# Altium PCB audio_led_lamp.PcbDoc
Units mm, origin at the board's own origin, x right, y up, seen from the top; angles counter-clockwise.
Board outline 23 x 43.02 mm, 2 copper layers (Top Layer, Bottom Layer); 17 components, 20 nets, 74 pads, 0 vias.
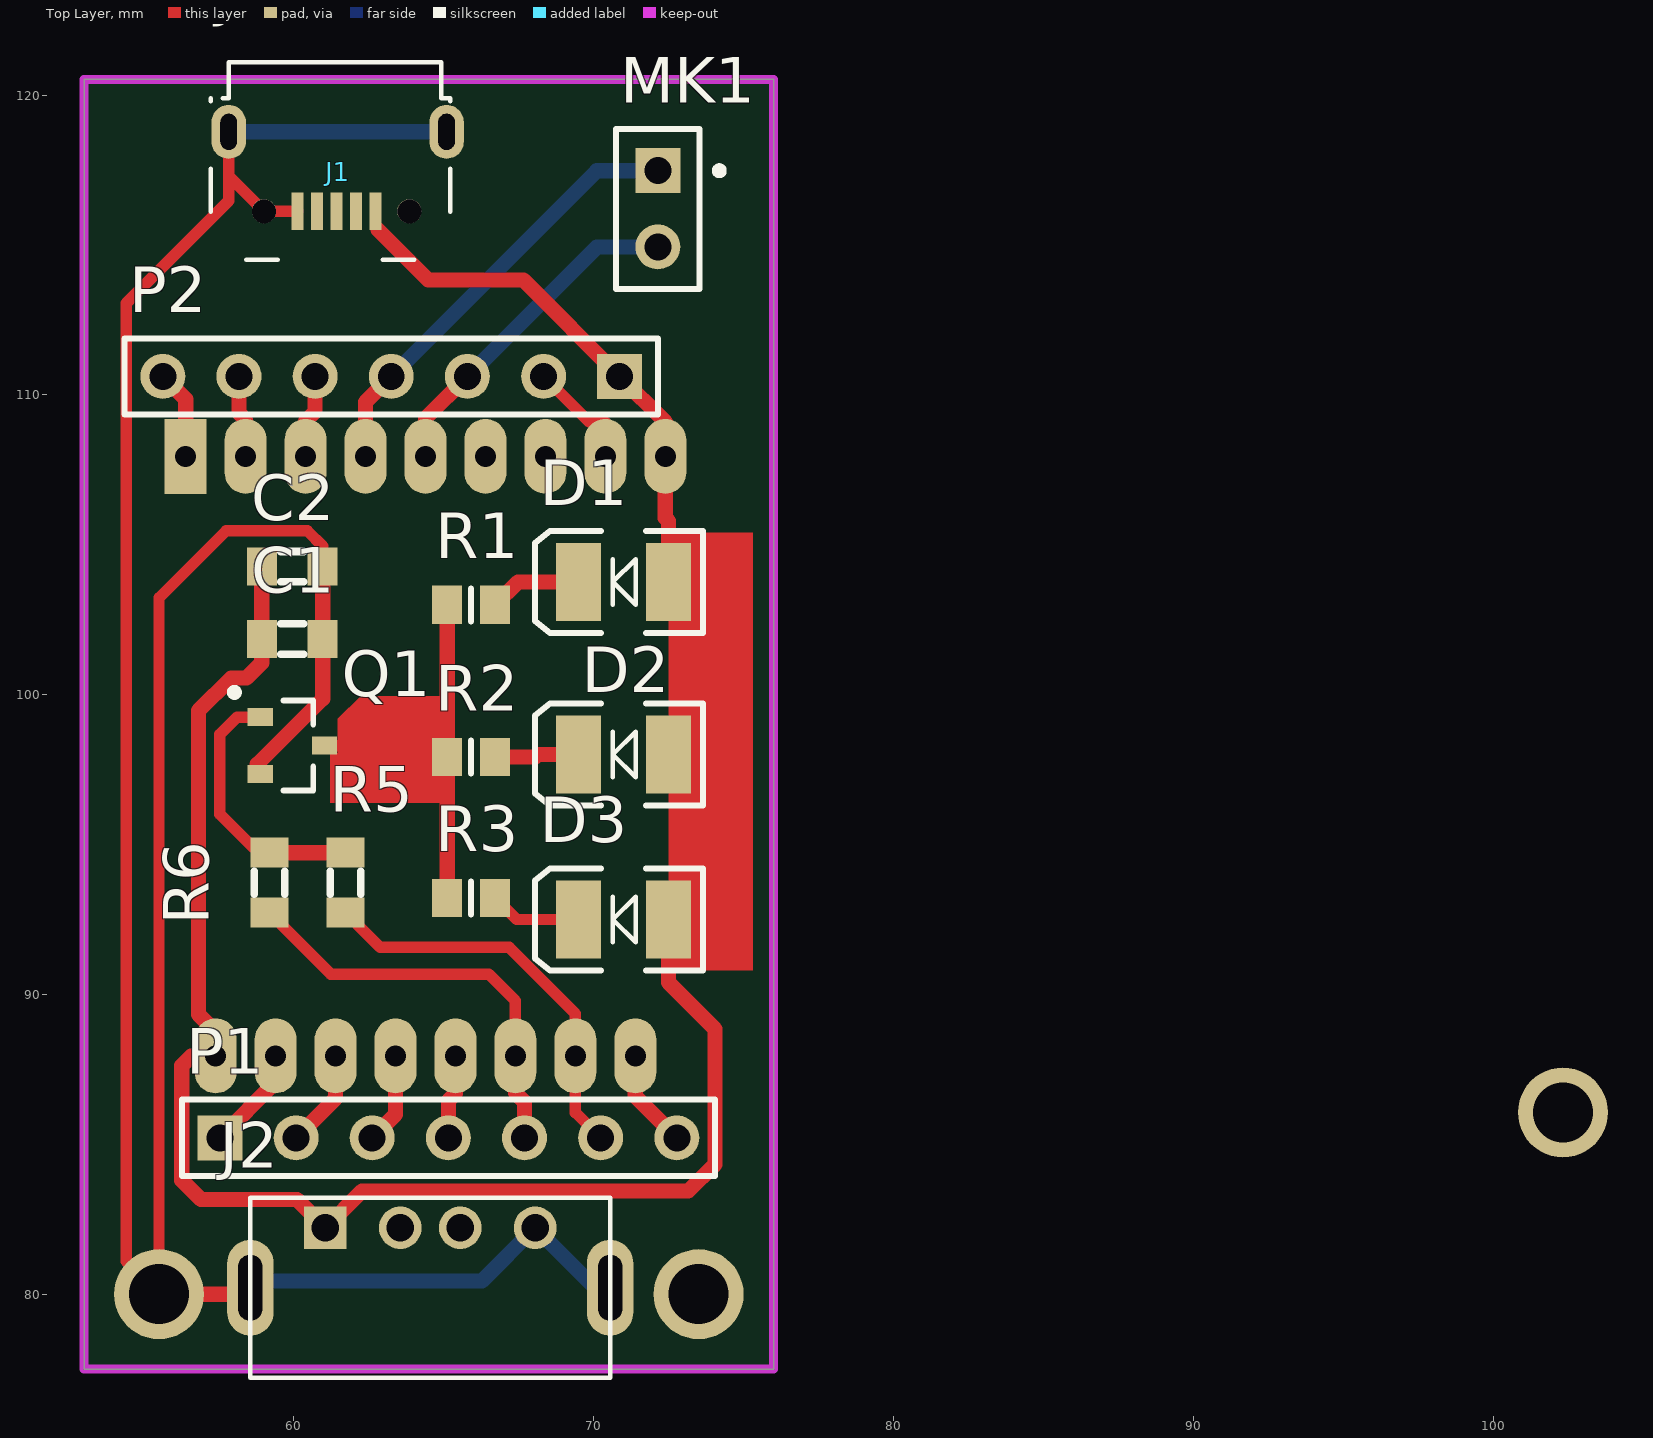
[diagram p0: Top Layer view]
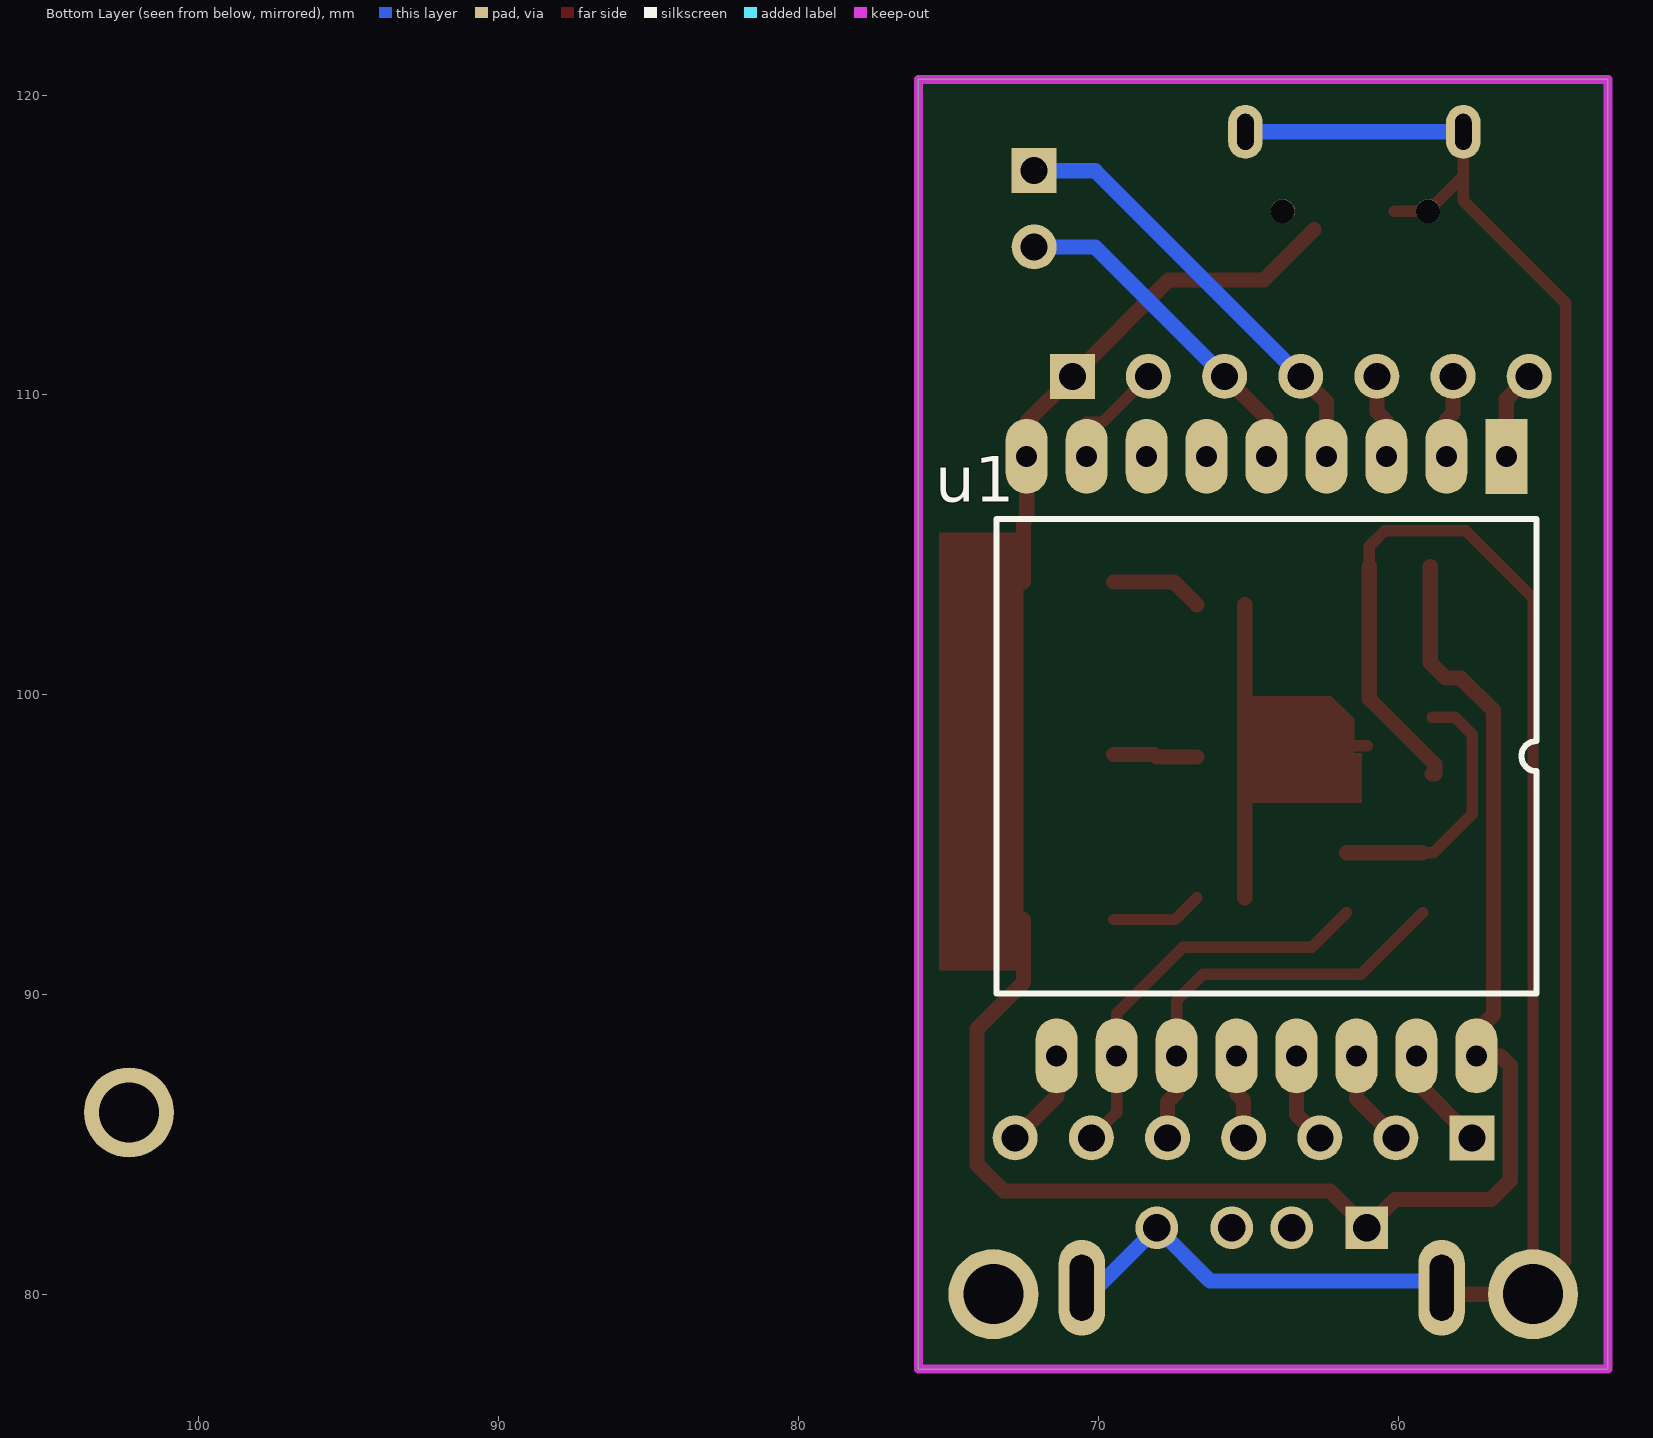
[diagram p1: Bottom Layer view, seen from below]

## Layer stack, top to bottom
Top Layer: signal copper 0.0356
Dielectric: dielectric 0.32, FR-4, Dk 4.8
Bottom Layer: signal copper 0.0356

## Board outline
53,77.5 53,120.523 76,120.523 76,77.5

## Design rules (kind name [scope] priority, off if disabled: settings)
Clearance clearance_vcc [InNet('VCC') vs InNet('GND')] p1: gap=0.254
Clearance [All] p2: gap=0.254
ComponentClearance [All] p1: gap=0.254 collisioncheckmode=3 verticalgap=0.254
PolygonConnect [All] p1: connectstyle=Relief reliefconductorwidth=0.254 reliefentries=4 polygonreliefangle="90 Angle"
RoutingVias [All] p1: holewidth=0.6 width=1 viastyle="Through Hole" minholewidth=0.711 minwidth=1.27 maxholewidth=0.711 maxwidth=1.27
SolderMaskExpansion [All] p1: expansion=0.102
TestPointUsage [All] p1: valid=0 allowmultiple=FALSE
Testpoint [All] p1: side=15 testpointundercomponent=TRUE minsize=1.016 maxsize=2.54 preferedsize=1.524 minholesize=0 maxholesize=1.016 preferedholesize=0.813 testpointgrid=0.025 style=1023 order=0123456789
Width vcc [InNet('VCC')] p1: maxlimit=1 minlimit=0.254 preferedwidth=0.508
Width all [All] p2: maxlimit=0.508 minlimit=0.254 preferedwidth=0.381
Width gnd [InNet('GND')] p3: maxlimit=1 minlimit=0.254 preferedwidth=0.508
18 further rules are at their usual default settings.

## Components (designator, comment, footprint, x,y, rotation, side; value= is the part's Value field where it differs from the comment)
C1 "Cap" C0805_N 59.944,101.854 r180 top
C2 "Cap" C0805_N 59.944,104.267 r180 top
D1 "LED" LED3528 70.993,103.759 r180 top
D2 "LED" LED3528 70.993,98.002 r180 top
D3 "LED" LED3528 70.993,92.498 r180 top
J1 "usb-micro-b" usb-micro-b 65.024,120.523 r180 top
J2 "USB 2.0 Type A" usb-a-mail 58.547,77.216 r0 top
MK1 "Mic2" PIN2 72.136,117.475 r270 top
P1 "Header 7" HDR1X7 57.531,85.217 r0 top
P2 "Header 7" HDR1X7 70.866,110.617 r180 top
Q1 "NPN" SOT23-3_L 59.944,98.298 r0 top
R1 "Res" R0805_L 65.913,102.997 r0 top
R2 "Res" R0805_L 65.913,97.917 r0 top
R3 "Res" R0805_L 65.913,93.218 r0 top
R5 "Res" R0805_M 61.722,93.726 r90 top
R6 "Res" R0805_M 59.182,93.726 r90 top
u1 "snr9813" SNR9813M17 56.388,107.95 r270 bottom

## Footprints (in the part's own frame and the unit in brackets; to place one, negate y for a bottom-side part, rotate by r counter-clockwise, add the part's x,y. Pads: shape width x height; smd on the part's side, far side on the other; paste and mask are expansions set on the pad)
C0805_N [mm] "Chip Capacitor, Body 2.0x1.2mm, IPC Medium Density"
  rect 1x1.27 smd: 1(-1.016,0) 2(1.016,0)
  silkscreen extent -0.38,-0.51 0.38,0.51, body extent -1,-0.6 1,0.6, height 0.7
HDR1X7 [mm] "Connector; Header; 7 Position"
  rect 1.5x1.5 hole 0.9: 1(0,0)
  round 1.5 hole 0.9: 2(2.54,0) 3(5.08,0) 4(7.62,0) 5(10.16,0) 6(12.7,0) 7(15.24,0)
  silkscreen extent -1.27,-1.27 16.51,1.27
LED3528 [mm] "SM LED; 2 C-Bend Leads; Body 3.5 x 2.8 x 1.9 mm, inc leads (LxWxH typ)"
  rect 1.5x2.6 smd: 1(-1.5,0) 2(1.5,0)
  silkscreen extent -2.65,-1.7 2.95,1.7, body extent -1.75,-1.4 1.75,1.4, height 1.9
PIN2 [mm] "Photosensitive Diode; 2 Leads"
  rect 1.5x1.5 hole 0.9: 1(0,0)
  round 1.5 hole 0.9: 2(2.54,0)
  silkscreen extent -1.4,-1.4 3.94,2.18
R0805_L [mm] "Chip Resistor, Body 2.0x1.2mm, IPC High Density"
  rect 1x1.27 smd: 1(-0.8,0) 2(0.8,0)
  silkscreen extent 0,-0.55 0,0.55, body extent -1,-0.6 1,0.6, height 0.5
R0805_M [mm] "Chip Resistor, Body 2.0x1.2mm, IPC Medium Density"
  rect 1x1.27 smd: 1(-1,0) 2(1,0)
  silkscreen extent -0.38,-0.51 0.38,0.51, body extent -1,-0.6 1,0.6, height 0.5
SNR9813M17 [mm]
  rect 2.5x1.4 hole 0.7: 1(0,0)
  oval 2.5x1.4 hole 0.7: 2(0,-2) 3(0,-4) 4(0,-6) 5(0,-8) 6(0,-10) 7(0,-12) 8(0,-14) 9(0,-16) 10(20,-15) 11(20,-13) 12(20,-11) 13(20,-9) 14(20,-7) 15(20,-5) 16(20,-3) 17(20,-1)
  silkscreen extent 2.08,-17 17.92,1
SOT23-3_L [mm] "SOT23, 3-Leads, Body 2.9x1.3mm, Pitch 0.95mm, Lead Span 2.3mm - Reverse Pinning, IPC High Density"
  rect 0.85x0.6 smd: 1(-1.075,0.95) 2(-1.075,-0.95) 3(1.075,0)
  silkscreen extent -2.06,-1.5 0.7,1.9, body extent -1.39,-1.46 1.41,1.44, height 1.2
usb-a-mail [mm]
  rect 1.42x1.42 hole 0.92: 1(2.5,5)
  round 1.42 hole 0.92: 2(5,5) 3(7,5) 4(9.5,5)
  oval 1.55x3.2 hole 0.8 slot 2.2 at 90 deg: S1(0,3) S2(12,3)
  silkscreen extent 0,0 12,6, body extent -1.27,-1.16 13.03,6.24, height 10.05
usb-micro-b [mm]
  rect 0.4x1.25 smd: 1(2.3,4.4) 2(2.95,4.4) 3(3.6,4.4) 4(4.25,4.4) 5(4.9,4.4)
  round 0.8 hole 0.8 unplated: M1(1.175,4.4) M2(6.025,4.4)
  oval 1.15x1.8 hole 0.55 slot 1.2 at 90 deg: S1(-0.068,1.75) S2(7.2,1.75)
  silkscreen extent -0.19,-0.58 7.81,6.02, body extent -0.19,-0.58 7.81,6.03, height 2.77

## Part data
C1 C2: "Capacitor"
D1 D2 D3: "Typical LED"
J2: library part usb-a-male
MK1: "Microphone"
P1 P2: library part "Header 8", "Header, 8-Pin"
Q1: "NPN General Purpose Amplifier"
R1 R2 R3 R5 R6: "Resistor"

## Free pads (board coordinates)
  round 3 hole 2: 0(55.5,80) 0(73.5,80) 0(102.329,86.064)

## Nets (pads, with @x,y where several pads share a name; then routed paths per layer and width w, separated by ;. In a path a pad name is that pad's centre, name@x,y a point inside that pad or via, vN(x,y) a via of type N, cw(c..) or ccw(c..) an arc to the next point about the centre after c; other vN are vias at no path point)
GND: C1.1 C2.1 J1.5 J1.M2 J1.S1 J1.S2 J2.4 J2.S1 J2.S2 pad.0@55.5,80 Q1.2 | length 106.2
  Top Layer w0.381: J1.S2 57.824,117.298 ; J1.5 J1.M2 57.824,117.298 ; C2.1 60.96,104.953 60.452,105.461 57.734,105.461 55.5,103.227 55.5,80 54.407,81.093 54.407,113.055 57.824,116.473 57.824,117.298
  Top Layer w0.508: pad.0@55.5,80 58.547,80 J2.S1 ; Q1.2 58.776,97.348 58.776,97.678 60.96,99.862 C1.1 C2.1
  Bottom Layer w0.508: J1.S2 J1.S1 ; J2.S1 58.547,80.442 66.273,80.442 J2.4 70.047,80.216 J2.S2
MICN: MK1.1 P2.4 u1.4 | length 14.8
  Top Layer w0.508: u1.4 62.388,109.759 P2.4
  Bottom Layer w0.508: P2.4 70.104,117.475 MK1.1
MICP: MK1.2 P2.3 u1.5 | length 11.4
  Top Layer w0.508: u1.5 64.388,109.219 P2.3
  Bottom Layer w0.508: P2.3 70.104,114.935 MK1.2
NetD1_2: D1.2 R1.2 | length 3.1
  Top Layer w0.508: R1.2 67.475,103.759 D1.2
NetD2_2: D2.2 R2.2 | length 2.8
  Top Layer w0.508: R2.2 68.047,97.917 68.131,98.002 D2.2
NetD3_2: D3.2 R3.2 | length 3.1
  Top Layer w0.381: R3.2 67.433,92.498 D3.2
NetP1_1: P1.1 u1.16 | length 3.5
  Top Layer w0.508: P1.1 59.388,87.074 u1.16
NetP1_2: P1.2 u1.15 | length 3.3
  Top Layer w0.508: P1.2 61.388,86.534 u1.15
NetP1_3: P1.3 u1.14 | length 3.1
  Top Layer w0.508: P1.3 63.388,85.994 u1.14
NetP1_7: P1.7 u1.10 | length 3.3
  Top Layer w0.508: u1.10 71.388,86.6 P1.7
NetP2_2: P2.2 u1.8 | length 3.8
  Top Layer w0.381: P2.2 69.85,109.093 70.388,109.093 u1.8
NetP2_5: P2.5 u1.3 | length 2.8
  Top Layer w0.508: u1.3 60.388,109.118 60.706,109.436 P2.5
NetP2_6: P2.6 u1.2 | length 2.8
  Top Layer w0.508: P2.6 58.166,109.391 58.388,109.169 u1.2
NetP2_7: P2.7 u1.1 | length 3
  Top Layer w0.508: P2.7 56.388,109.855 u1.1
NetQ1_1: Q1.1 R5.2 R6.2 | length 9
  Top Layer w0.381: Q1.1 58.1,99.248 57.531,98.679 57.531,96.012 58.817,94.726 R6.2
  Top Layer w0.508: R6.2 R5.2
NetQ1_3: Q1.3 R1.1 R2.1 R3.1 | length 14
  Top Layer w0.381: Q1.3 62.865,98.298 63.246,97.917 R2.1
  Top Layer w0.508: R3.1 R2.1 R1.1
PWM3: P1.6 R5.1 u1.11 | length 13.6
  Top Layer w0.381: R5.1 62.881,91.567 67.178,91.567 69.388,89.357 u1.11 69.388,86.06 P1.6
PWM4: P1.5 R6.1 u1.12 | length 14.1
  Top Layer w0.381: R6.1 61.23,90.678 66.497,90.678 67.388,89.787 u1.12
  Top Layer w0.508: u1.12 67.388,86.714 67.691,86.411 P1.5
PWM5: P1.4 u1.13 | length 2.8
  Top Layer w0.508: P1.4 65.151,86.462 65.388,86.699 u1.13
VCC: C1.2 C2.2 D1.1 D2.1 D3.1 J1.1 J2.1 P2.1 u1.9 u1.17 | length 68.6
  Top Layer w0.508: C2.2 C1.2 58.928,101.067 58.42,100.559 57.912,100.559 56.82,99.466 56.82,89.332 57.388,88.764 u1.17 57.388,87.935 56.566,87.935 56.261,87.63 56.261,83.795 56.896,83.16 60.103,83.16 J2.1 62.27,83.439 73.152,83.439 74.041,84.328 74.041,88.851 72.493,90.399 D3.1 ; J1.1@62.801,115.506 64.48,113.828 67.655,113.828 P2.1 72.388,109.095 u1.9 72.388,105.896 72.493,105.791 D1.1
pads on no net: J1.2 J1.3 J1.4 J1.M1 J2.2 J2.3 u1.6 u1.7

## Keep-outs
Keep-Out Layer:
  the board outline again, w0.3

## Other copper
Top Layer:
  rectangle net VCC: 72.493,90.805 75.311,105.41
  region net NetQ1_3: 61.214,98.044 61.214,96.393 65.113,96.393 65.113,99.949 62.23,99.949 61.468,99.187 61.468,98.044

## Dimensions
53,77.5 to 53,120.523 on Mechanical 1
53,77.5 to 76,77.5 on Mechanical 1

## Text inside footprints (layer, text, board x,y; h text height)
J1: Mechanical 1 "PCB Thickness 1.2mm" at 64.617,121.799 h0.76 r180; Mechanical 1 "PCB Edge" at 62.617,120.299 h0.76 r180